# EAGLE board Syn-ShieldCarger-v06 (EAGLE 5.10)

Size 69.22 x 46.99 mm. Coordinates in mm from the lower left corner, seen from the top.
Outline: 0,0 69.22,0 69.22,46.99 0,46.99 0,0
Copper layers (1*16): Top 0.0356mm / dielectric 1.5011mm / Bottom 0.0356mm
Design rules "LaenPCBOrder-JCModified *": minimum track width 10mil, minimum drill 13mil, track to track 10mil, track to pad 6mil, pad to pad 6mil, via to via 6mil, smd to smd 6mil, copper to edge 15mil, drill to drill 6mil, minimum pad ring 12mil, minimum via ring 7mil, stop-mask expansion 4mil, vias tented up to drill 25mil, thermal gap 10mil

## Footprints (pad centres in the part's own frame; a part is rotated, then mirrored left to right if it is on the bottom)
0603-CAP = smd 1.1 x 1: 1 -0.85,0; 2 0.85,0
1206 = smd 1.6 x 1.8: 1 -1.4,0; 2 1.4,0
CHIPLED_0603 = smd 0.8 x 0.8: A 0,-0.75; C 0,0.75
JST-PH-2-THM-RA = drill 0.8 pad 1.422 round: 1 1,0; 2 -1,0
USB-MINIB = smd 0.5 x 2.308: D+ 0,4.064; D- -0.8,4.064; GND 1.6,4.064; ID 0.8,4.064; VBUS -1.6,4.064 | smd 2 x 2.4: GND1 -4.4,-2; GND2 -4.4,3.5; GND3 4.4,3.5; GND4 4.4,-2 | hole 0.9: -2.2,1; 2.2,1
SOD-323 = smd 0.63 x 0.83: 1 -1.15,0; 2 1.15,0
SMA-DIODE = smd 1.27 x 1.47: A -2.15,0; C 2.15,0
SOT23-3 = smd 0.8 x 0.9: 1 -0.95,-1; 2 0.95,-1; 3 0,1.1
TSSOP8-4.4MM = smd 1.2 x 0.35: 1 -3.1,0.975; 2 -3.1,0.325; 3 -3.1,-0.325; 4 -3.1,-0.975; 5 3.1,-0.975; 6 3.1,-0.325; 7 3.1,0.325; 8 3.1,0.975
DS2764 = smd 0.305 x 0.991: CC -2.275,-2.918; DC -0.975,-2.918; IS1 2.275,2.918; IS2 2.275,-2.918; PLS -1.625,-2.918; PS 1.625,-2.918; SCL -0.975,2.918; SDA 1.625,2.918; SNS -0.325,-2.918; SNS1 0.325,-2.918; SNS2 0.975,-2.918; VDD -1.625,2.918; VIN -2.275,2.918; VSS -0.325,2.918; VSS1 0.325,2.918; VSS2 0.975,2.918
SO16-150MIL = smd 0.66 x 2.032: 1 -4.445,-3.073; 2 -3.175,-3.073; 3 -1.905,-3.073; 4 -0.635,-3.073; 5 0.635,-3.073; 6 1.905,-3.073; 7 3.175,-3.073; 8 4.445,-3.073; 9 4.445,3.073; 10 3.175,3.073; 11 1.905,3.073; 12 0.635,3.073; 13 -0.635,3.073; 14 -1.905,3.073; 15 -3.175,3.073; 16 -4.445,3.073
1X02 = drill 1.016 pad 1.88 round: 1 0,0; 2 2.54,0
SJ_2S = smd 0.635 x 1.27: 1 -0.45,0; 2 0.45,0
STAND-OFF = hole 3.302: 0,0
SCREWTERMINAL-3.5MM-2 = drill 1.2 pad 2.032 square: 1 0,0 | drill 1.2 pad 2.032 round: 2 3.5,0
1X12 = drill 1.016 pad 1.88 round: 1 0,0; 2 2.54,0; 3 5.08,0; 4 7.62,0; 5 10.16,0; 6 12.7,0; 7 15.24,0; 8 17.78,0; 9 20.32,0; 10 22.86,0; 11 25.4,0; 12 27.94,0
SJ_2 = smd 1.168 x 1.6: 1 -1.524,0; 2 0,0; 3 1.524,0
0603-RES = smd 1.1 x 1: 1 -0.85,0; 2 0.85,0
AXIAL-0603 = drill 0.9 pad 1.88 round: P$1 -3.81,0; P$2 3.81,0
SJ_3 = smd 0.635 x 1.27: 1 -0.889,0; 2 0,0; 3 0.889,0
SYNAPSERFENGINE-THM = drill 0.8 square: 1 0,0; 24 31.2,0 | drill 0.8 pad 1.422 octagon: 2 0,-2; 3 0,-4; 4 0,-6; 5 0,-8; 6 0,-10; 7 0,-12; 8 0,-14; 9 0,-16; 10 0,-18; 11 0,-20; 12 0,-22; 13 31.2,-22; 14 31.2,-20; 15 31.2,-18; 16 31.2,-16; 17 31.2,-14; 18 31.2,-12; 19 31.2,-10; 20 31.2,-8; 21 31.2,-6; 22 31.2,-4; 23 31.2,-2 | hole 3.2: 3.17,6.16; 28.03,6.16
SYNSJ-STACK = drill 1.016 pad 1.88 round: G0 0,-7.62; G1 0,-10.16; G2 0,-12.7; G3 0,-15.24; G4 0,-17.78; G5 0,-20.32; G6 0,-22.86; G7 0,-25.4; G8 0,-27.94; G9 0,-30.48; G10 0,-33.02; G11 40.64,-33.02; G12 40.64,-30.48; G13 40.64,-27.94; G14 40.64,-25.4; G15 40.64,-22.86; G16 40.64,-20.32; G17 40.64,-17.78; G18 40.64,-15.24; GND 0,-5.08; GND1 40.64,-5.08; R1 0,0; R2 0,-2.54; R3 0,-35.56; R4 0,-38.1; R5 40.64,-38.1; R6 40.64,-35.56; RESERVED 40.64,-10.16; RESET 40.64,-7.62; VCC 40.64,-12.7
SOT23-5 = smd 0.55 x 1.2: 1 -0.95,-1.3; 2 0,-1.3; 3 0.95,-1.3; 4 0.95,1.3; 5 -0.95,1.3

## Placement (x,y rotation side)
C1  0.47uF  [0603-CAP]  27.94,8.89 90 top
C2  10uF  [1206]  27.94,13.97 90 top
C3  10uF  [1206]  30.16,20.32 270 top
C4  1uF  [0603-CAP]  16.51,34.92 0 top
C5  1uF  [0603-CAP]  21.59,34.92 0 top
C6  1nF  [0603-CAP]  12.06,21.59 270 top
C7  [0603-CAP]  17.78,30.8 0 top
C8  [0603-CAP]  21.27,30.8 0 top
C13  0.1uF  [0603-CAP]  25.4,27.62 0 top
C14  0.1uF  [0603-CAP]  19.05,19.05 0 top
CHARGE  ORG  [CHIPLED_0603]  3.49,45.09 180 top
CN1  [JST-PH-2-THM-RA]  5.71,21.59 90 top
CN3  [USB-MINIB]  3.81,30.48 270 top
D1  [SOD-323]  10.79,34.29 180 top
D2  [SMA-DIODE]  9.21,13.02 90 top
D3  ADR510  [SOT23-3]  63.5,29.21 90 top
ERR  RED  [CHIPLED_0603]  5.71,45.09 180 top
IC1  IRF7750  [TSSOP8-4.4MM]  19.05,27.94 0 top
IC2  DS2764  [DS2764]  19.05,22.86 270 top
IC3  [SO16-150MIL]  19.05,11.43 270 top
JP1  [1X02]  9.53,22.86 270 top
JP2  [SJ_2S]  59.69,31.11 0 top
JP3  [SJ_2S]  57.15,13.97 0 top
JP4  STAND-OFF  [STAND-OFF]  61.59,39.37 0 top
JP5  STAND-OFF  [STAND-OFF]  7.62,39.37 0 top
JP6  [SCREWTERMINAL-3.5MM-2]  3.81,12.7 90 top
JP7  M12PTH  [1X12]  64.77,34.29 180 top
JP8  M12PTH  [1X12]  64.77,11.43 180 top
JP9  [SJ_2S]  43.18,31.11 180 top
JP10  [SJ_2S]  40.01,31.11 180 top
JP11  [SJ_2S]  57.15,31.11 0 top
JP12  STAND-OFF  [STAND-OFF]  61.59,7.62 0 top
JP15  [SJ_2]  10.16,3.81 180 top
JP17  STAND-OFF  [STAND-OFF]  7.62,7.62 0 top
LED3  [CHIPLED_0603]  1.91,45.09 0 top
R1  10K  [0603-RES]  63.5,26.04 180 top
R2  6.19K  [0603-RES]  15.24,4.76 180 top
R3  7.3K  [0603-RES]  18.73,4.76 0 top
R4  1K  [0603-RES]  7.62,45.02 90 top
R7  1K  [0603-RES]  12.7,29.21 180 top
R8  1K  [0603-RES]  12.7,26.99 180 top
R9  15R  [0603-RES]  12.7,24.77 0 top
R13  1K  [0603-RES]  25.4,25.4 0 top
R14  15R  [0603-RES]  25.4,23.18 0 top
R15  15R  [0603-RES]  25.4,20.95 0 top
R16  15R  [0603-RES]  25.4,18.73 0 top
R_PROG  [AXIAL-0603]  12.38,12.7 90 top
RTH  10K @ 25degC  [AXIAL-0603]  18.73,2.22 0 top
SJ1  [SJ_3]  43.18,22.86 0 top
SJ2  [SJ_3]  52.07,21.59 0 top
U$1  SYNAPSEWIRELESS-RFENGINESTD  [SYNAPSERFENGINE-THM]  57.15,39.62 270 top
U$2  MAX6520SOT23-3  [SOT23-3]  58.42,26.67 270 top
U$3  SYNAPSE-SJ-STCKINGD30-1600  [SYNSJ-STACK]  67.31,44.45 270 top
VRAUX  MCP1802  [SOT23-5]  21.59,38.1 90 top
VRMAIN  MCP1802  [SOT23-5]  16.51,38.1 90 top

## Library data of the parts
C1-C8 C13 C14 D1 D2 JP1-JP12 JP15 JP17 R1 R4 R7-R9 R13-R16 SJ1 SJ2 = SparkFun
CHARGE CN1 CN3 ERR LED3 = adafruit
D3 VRAUX VRMAIN = 0_jc-modified
IC1 IC2 = ssozonoff
IC3 R2 R3 R_PROG RTH U$1-U$3 = 0_jc-custom

## Nets
AUX_SHDN: JP11.1 VRAUX.3
CC: IC2.CC R8.2
DC: IC2.DC R7.2
GND: C1.2 C2.2 C3.2 C4.2 C5.2 C6.2 CN3.GND D3.2 IC2.PS IC2.SNS IC2.SNS1 IC2.SNS2 IC3.6 IC3.11 IC3.15 JP6.2 JP7.1 JP8.1 JP15.3 R3.2 R4.1 R_PROG.P$1 RTH.P$2 U$1.1 U$1.24 U$2.3 U$3.GND U$3.GND1 VRAUX.2 VRMAIN.2
GP0: JP7.2 U$1.2 U$3.G0
GP1: JP2.1 JP7.3 U$1.3 U$2.1 U$3.G1
GP2: JP7.4 JP11.2 U$1.4 U$3.G2
GP3: JP7.5 U$1.5 U$3.G3
GP4: JP7.6 U$1.6 U$3.G4
GP5: JP7.7 U$1.7 U$3.G5
GP6: JP7.8 U$1.8 U$3.G6
GP7: JP7.9 U$1.9 U$3.G7
GP8: JP7.10 U$1.10 U$3.G8
GP9: JP7.11 JP9.2 U$1.11 U$3.G9
GP10: JP7.12 JP10.2 U$1.12 U$3.G10
GP11: JP8.12 SJ1.3 U$1.13 U$3.G11
GP12: JP8.11 SJ2.3 U$1.14 U$3.G12
GP13: JP8.10 U$1.15 U$3.G13
GP14: JP8.9 U$1.16 U$2.2 U$3.G14
GP15: JP8.8 U$1.17 U$3.G15
GP16: JP3.1 JP8.7 U$1.18 U$3.G16
GP17: JP8.6 SJ2.1 U$1.19 U$3.G17
GP18: JP8.5 SJ1.1 U$1.20 U$3.G18
GP19: JP8.3 U$1.22 U$3.RESERVED
I2C_SCL: R15.2 SJ1.2
I2C_SDA: R16.2 SJ2.2
N$1: IC1.1 IC1.8
N$2: LED3.C R4.2
N$3: D3.1 JP3.2 R1.1
N$4: JP2.2 R1.2
N$5: IC1.4 R8.1
N$6: IC3.7 JP15.2
N$7: IC3.8 R2.2
N$8: IC3.9 R2.1 R3.1 RTH.P$1
N$9: C1.1 IC3.10
N$10: JP15.1 R_PROG.P$2
N$14: IC1.5 R7.1
N$15: IC2.VIN R13.1
N$16: C14.2 IC2.IS1
N$17: IC2.SCL R15.1
N$18: C13.1 IC2.VDD R14.1
N$19: C7.2 C8.1
N$21: CN3.VBUS D1.2
N$24: C14.1 IC2.IS2
N$25: IC2.SDA R16.1
PAC+: C8.2 CN1.1 IC1.6 IC1.7 JP1.1 R13.2 R14.2
PAC-: C13.2 CN1.2 IC2.VSS IC2.VSS1 IC2.VSS2 JP1.2
PLS: IC2.PLS R9.2
RESET: JP8.2 U$1.23 U$3.RESET
STAT1: CHARGE.C IC3.2 JP10.1
STAT2: ERR.C IC3.1 JP9.1
VBAT+: C2.1 C6.1 C7.1 IC1.2 IC1.3 IC3.12 IC3.13 IC3.14 R9.1 VRAUX.1 VRMAIN.1 VRMAIN.3
VCC3: C4.1 CHARGE.A ERR.A U$1.21 U$3.R1 U$3.VCC VRMAIN.5
VCC3_AUX: C5.1 JP8.4 U$3.R2 VRAUX.5
VIN: C3.1 D1.1 D2.C IC3.3 IC3.4 IC3.5 IC3.16 LED3.A
VINJ: D2.A JP6.1

## Tracks (layer width: path | path; a pad name or v marks a point on that pad's centre or on a via)
AUX_SHDN  (1 unrouted)
CC  (1 unrouted)
DC  (1 unrouted)
GND  (29 unrouted)
GP0  (2 unrouted)
GP1  (4 unrouted)
GP2  (3 unrouted)
GP3  (2 unrouted)
GP4  (2 unrouted)
GP5  (2 unrouted)
GP6  (2 unrouted)
GP7  (2 unrouted)
GP8  (2 unrouted)
GP9  (3 unrouted)
GP10  (3 unrouted)
GP11  (3 unrouted)
GP12  (3 unrouted)
GP13  (2 unrouted)
GP14  (3 unrouted)
GP15  (2 unrouted)
GP16  (3 unrouted)
GP17  (3 unrouted)
GP18  (3 unrouted)
GP19  (2 unrouted)
I2C_SCL  (1 unrouted)
I2C_SDA  (1 unrouted)
N$1  (1 unrouted)
N$2  (1 unrouted)
N$3  (2 unrouted)
N$4  (1 unrouted)
N$5  (1 unrouted)
N$6  (1 unrouted)
N$7  (1 unrouted)
N$8  (3 unrouted)
N$9  (1 unrouted)
N$10  (1 unrouted)
N$14  (1 unrouted)
N$15  (1 unrouted)
N$16  (1 unrouted)
N$17  (1 unrouted)
N$18  (2 unrouted)
N$19  (1 unrouted)
N$21  (1 unrouted)
N$24  (1 unrouted)
N$25  (1 unrouted)
PAC+  (6 unrouted)
PAC-  (5 unrouted)
PLS  (1 unrouted)
RESET  (2 unrouted)
STAT1  (2 unrouted)
STAT2  (2 unrouted)
VBAT+  (11 unrouted)
VCC3  (6 unrouted)
VCC3_AUX  (3 unrouted)
VIN  (7 unrouted)
VINJ  (1 unrouted)

## Text on the board
tPlace: R4 | RTH | RTH | VR_Aux | Error | Charge | Power | VR_Main | R3 | D1 | C4 | C5 | Stat1 | Stat2 | ADC_Ref | Aux_SHDN | ADR510 | R1 | MAX6520 | C1 | C2 | C3 | R5 | ADC_RefA | R6 | D2 | Open = 100ma | R_Prog | Right = Prog | Left = 1200ma | R2
bPlace: R4 | R3 | G10 | G9 | G8 | G7 | G6 | G5 | G4 | G3 | G2 | G1 | G0 | GND | R2 | R1 | G10 | G9 | G8 | G7 | G6 | G5 | G4 | G3 | G2 | G1 | G0 | GND | + | LiPo | - | RFEngine Charging Base v1.1 | J.C. Woltz & Serge Sozonoff | - | GP11 | GP12 | GP13 | GP14 | GP15 | GP16 | GP17 | GP18_PF7 | Vcc3_out | G19 | Reset | GND | + | 20101111 | R5 | R6 | G11 | G12 | G13 | G14 | G15 | G16 | G17 | G18 | vcc | G19 | RST | GND